# Altium PCB pmod_qspi_wson.PcbDoc
Units mil, origin at the board's own origin, x right, y up, seen from the top; angles counter-clockwise.
Board outline 1800 x 740 mil, 2 copper layers (Top Layer, Bottom Layer); 18 components, 19 nets, 82 pads, 24 vias.
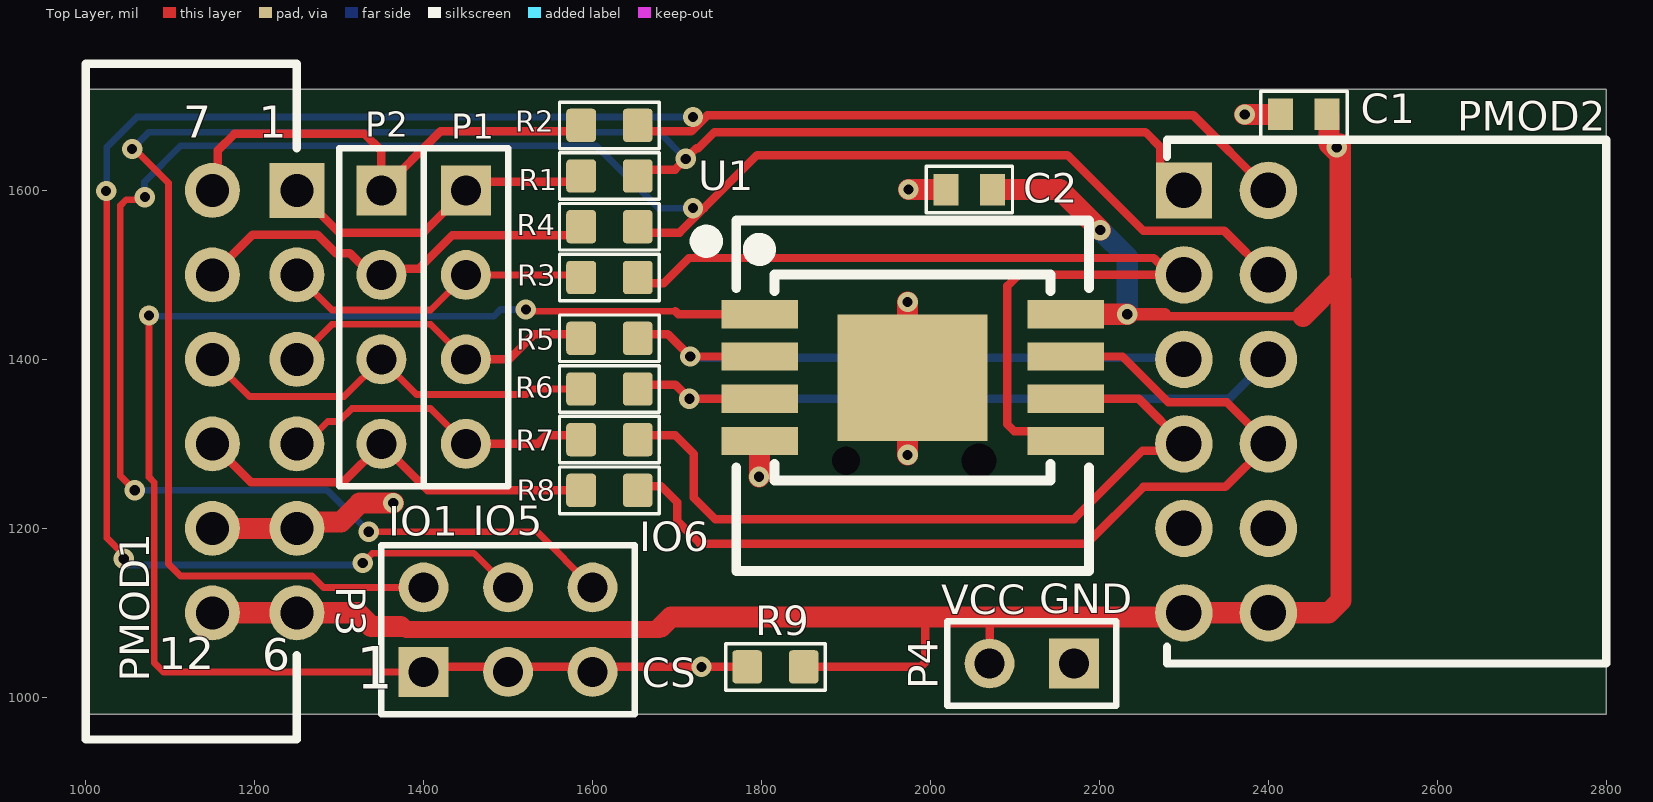
[diagram p0: Top Layer view]
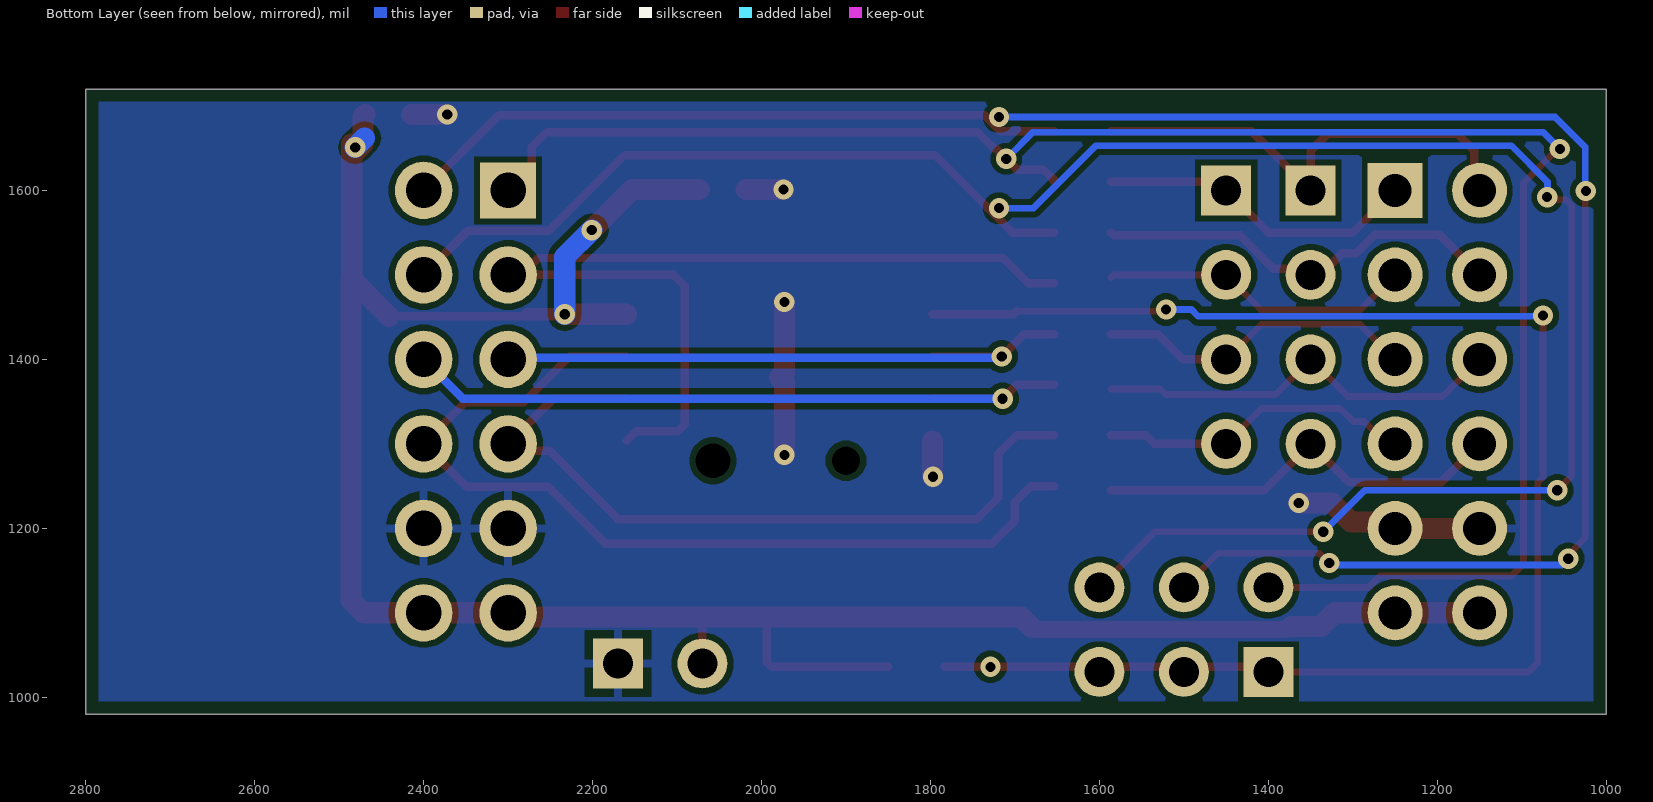
[diagram p1: Bottom Layer view, seen from below]

## Layer stack, top to bottom
Top Solder: solder mask 0.4, Solder Resist, Dk 3.5
Top Layer: signal copper 1.4
Dielectric 1: dielectric 12.6, FR-4, Dk 4.8
Bottom Layer: signal copper 1.4
Bottom Solder: solder mask 0.4, Solder Resist, Dk 3.5

## Board outline
1000,980 2800,980 2800,1720 1000,1720

## Design rules (kind name [scope] priority, off if disabled: settings)
BoardOutlineClearance [All] p1: gap=15 ignorepadtopadclearanceinfootprint=FALSE except(0: Arc-SplitContinuation Track-SplitContinuation SMDPad-SplitContinuation THPad-SplitContinuation Via-SplitContinuation Fill-SplitContinuation Poly-SplitContinuation Region-SplitContinuation Text-SplitContinuation)
Clearance [All] p1: gap=7 ignorepadtopadclearanceinfootprint=FALSE except(0: Arc-Hole Track-Hole SMDPad-Hole THPad-Hole Via-Hole Fill-Hole Poly-Hole Region-Hole Text-Hole)
PolygonConnect PolygonConnect_1 [isVia] p1: connectstyle=Direct reliefconductorwidth=10 reliefentries=4 polygonreliefangle="90 Angle" airgapwidth=10
PolygonConnect [All] p2: connectstyle=Relief reliefconductorwidth=10 reliefentries=4 polygonreliefangle="90 Angle" airgapwidth=10
RoutingVias [All] p1: holewidth=28 width=50 viastyle="Through Hole" minholewidth=12 minwidth=24 maxholewidth=28 maxwidth=50
SolderMaskExpansion [All] p1: expansion=4 istentingtop=FALSE
Width [All] p1: maxlimit=255 minlimit=6 preferedwidth=10 minimp=50.000000 maximp=50.000000 favimp=50.000000
30 further rules are at their usual default settings.

## Components (designator, comment, footprint, x,y, rotation, side; value= is the part's Value field where it differs from the comment)
C1 "100n" CAPC0603_M 2442,1690 r180 top
C2 "2u2" CAPC0603_M 2046,1601 r180 top
P1 "Header 4" HDR1X4 1450,1600 r270 top
P2 "Header 4" HDR1X4 1350,1600 r270 top
P3 "Header 3X2" HDR2X3 1400,1030 r0 top
P4 "Header 2" HDR1X2 2170,1040 r180 top
PMOD1 "PMOD-PINS" PMOD-68021-212HLF-MALE 1250,1600 r0 top
PMOD2 "PMOD-SOCKET" SAMTEC_SSW_106_02_X_D_RA_PMOD 2300,1600 r0 top
R1 "4R7" RESC1608X55N 1620,1617 r0 top
R2 "4R7" RESC1608X55N 1620,1677 r0 top
R3 "4R7" RESC1608X55N 1620,1497 r0 top
R4 "4R7" RESC1608X55N 1620,1557 r0 top
R5 "4R7" RESC1608X55N 1620,1425 r0 top
R6 "4R7" RESC1608X55N 1620,1365 r0 top
R7 "4R7" RESC1608X55N 1620,1305 r0 top
R8 "4R7" RESC1608X55N 1620,1245 r0 top
R9 "10k" RESC1608X55N 1816.54,1036 r0 top
U1 "WSON68 Socket or SPI on Board" SOK-SPI-WSON68_ORCHIP 1978.74,1378.43 r0 top

## Footprints (in the part's own frame and the unit in brackets; to place one, negate y for a bottom-side part, rotate by r counter-clockwise, add the part's x,y. Pads: shape width x height; smd on the part's side, far side on the other; paste and mask are expansions set on the pad)
CAPC0603_M [mm]
  rect 0.75x0.95 smd: 1(-0.7,0) 2(0.7,0)
  silkscreen extent -1.3,-0.7 1.3,0.7, body extent -0.85,-0.45 0.85,0.45, height 0.9
HDR1X2 [mm]
  rect 1.5x1.5 hole 0.9: 1(0,0)
  round 1.5 hole 0.9: 2(2.54,0)
  silkscreen extent -1.27,-1.27 3.81,1.27
HDR1X4 [mm] "Connector; Header; 4 Position"
  rect 1.5x1.5 hole 0.9: 1(0,0)
  round 1.5 hole 0.9: 2(2.54,0) 3(5.08,0) 4(7.62,0)
  silkscreen extent -1.27,-1.27 8.89,1.27
HDR2X3 [mm] "Connector; Header; 3x2 Position"
  rect 1.5x1.5 hole 0.9: 1(0,0)
  round 1.5 hole 0.9: 2(0,2.54) 3(2.54,0) 4(2.54,2.54) 5(5.08,0) 6(5.08,2.54)
  silkscreen extent -1.27,-1.27 6.35,3.81
PMOD-68021-212HLF-MALE [mil]
  rect 65x65 hole 39: 1(0,0)
  round 65 hole 39: 2(0,-100) 3(0,-200) 4(0,-300) 5(0,-400) 6(0,-500) 7(-100,0) 8(-100,-100) 9(-100,-200) 10(-100,-300) 11(-100,-400) 12(-100,-500)
  silkscreen extent -250,-650 0,150, body extent -490,-550 13,50, height 191
RESC1608X55N [mm] "Chip Resistor, Body 1.6x0.8mm, EIA 0603, IPC Medium Density"
  round 0.254 on Mech15: 0(0,0)
  rrect25% 0.9x1 smd: 1(-0.85,0) 2(0.85,0)
  Top Layer pour cut-out: -0.6,0.5 0.6,0.5 0.6,-0.5 -0.6,-0.5
  silkscreen extent -1.5,-0.7 1.5,0.7, body extent -0.87,-0.47 0.88,0.48, height 0.54
SAMTEC_SSW_106_02_X_D_RA_PMOD [mil]
  rect 66x66 hole 42: 1(0,0)
  round 68 hole 42: 2(0,-100) 3(0,-200) 4(0,-300) 5(0,-400) 6(0,-500) 7(100,0) 8(100,-100) 9(100,-200) 10(100,-300) 11(100,-400) 12(100,-500)
  silkscreen extent -20,-560 500,60, body extent -8,-560 495,60, height 195
SOK-SPI-WSON68_ORCHIP [mm] "DediProg SOK-SPI-WSON68 (Socket or Chip)"
  rect 2.3x0.85 smd: 1(-4.6,1.905) 2(-4.6,0.635) 3(-4.6,-0.635) 4(-4.6,-1.905) 5(4.6,-1.905) 6(4.6,-0.635) 7(4.6,0.635) 8(4.6,1.905)
  rect 4.5x3.8 smd: 9(0,0)
  round 0 hole 0.85 unplated: MH1(-2,-2.5)
  round 0 hole 1.05 unplated: MH1(2,-2.5)
  silkscreen extent -6.45,-5.82 5.3,4.72, body extent -5.11,-5.6 5.11,4.55, height 2.91

## Part data
C1: library part CCHIP-100n-0603, "100n, 0603", Case-EIA=0603, Case-Metric=1608, Manufacture 1=Kemet, Manufacture Part Number 1=C0603C104K5RACTU, Rated Voltage=50VDC, Supplier Part Number 1=399-5089-2-ND, Component Group=Capacitor, Component Type=Standard, Mounting Technology=SMT, Part Number=CCHIP-100n-0603, Pin Count=2, Supplier 1=Digi-Key
C2: library part CCHIP-2u2-0603, "2u2, 0603", Case-EIA=0603, Case-Metric=1608, Manufacture 1=Samsung, Manufacture Part Number 1=CL10B225KP8NNNC, Rated Voltage=10VDC, Supplier Part Number 1=1276-1134-1-ND, Component Group=Capacitor, Component Type=Standard, Mounting Technology=SMT, Part Number=CCHIP-2u2-0603, Pin Count=2, Supplier 1=Digi-Key
P1 P2: "Header, 4-Pin", LatestRevisionDate=17-Jul-2002, LatestRevisionNote="Re-released for DXP Platform.", Publisher="Altium Limited"
P3: library part CMP-011-000094-1, "Header, 3-Pin, Dual row", Component Type=Standard, Design Item ID="Header 3X2", LatestRevisionDate=17-Jul-2002, LatestRevisionNote="Re-released for DXP Platform.", Pin Count=6, Publisher="Altium Limited", Source="Miscellaneous Connectors.SchLib"
P4: library part CMP-004-000001-1, "Header, 2-Pin", Component Type=Standard, Design Item ID="Header 2", LatestRevisionDate=17-Jul-2002, LatestRevisionNote="Re-released for DXP Platform.", Pin Count=2, Publisher="Altium Limited", Source=CW313_20pinToTarget.SCHLIB
PMOD1: library part PMOD_2ROW_MALERATH, Component Group=Connector, Component Type=Standard, Part Number=PMOD_2ROW_MALERATH, Pin Count=12, PP Material Stack=0, PP Rotation=0, PP Rotation1=0, Supplier 1=Digi-Key
PMOD2: library part PMOD_2ROW_FEMALERATH, Supplier Part Number 1=SAM1215-06-ND, Component Group=Connector, Component Type=Standard, Part Number=PMOD_2ROW_FEMALERATH, Pin Count=12, PP Material Stack=0, PP Rotation=0, PP Rotation1=0, Supplier 1=Digi-Key
R1 R2 R3 R4 R5 R6 R7 R8: library part RCHIP-4R7-0603, "4R7 res, 0603, 1%, 1/10W", Case-EIA=0603, Case-Metric=1608, Manufacture 1=Yageo, Manufacture Part Number 1=RC0603FR-074R7L, Rated Power=0.1W, Rated Voltage=75VDC, Supplier Part Number 1=YAG3371CT-ND, Temperature Range="-55C to 155C", Tolerance=1%, Component Group=Resistor, Component Type=Standard, Mounting Technology=SMT, Part Number=RCHIP-4R7-0603, Pin Count=2, Supplier 1=Digi-Key
R9: library part RCHIP-10K-0603, "10k res, 0603, 1%, 1/10W", Case-EIA=0603, Case-Metric=1608, Manufacture 1=Yageo, Manufacture Part Number 1=RC0603FR-0710KL, Rated Power=0.1W, Rated Voltage=75VDC, Supplier Part Number 1=311-10.0KHRCT-ND, Temperature Range="-55C to 155C", Tolerance=1%, Component Group=Resistor, Component Type=Standard, Mounting Technology=SMT, Part Number=RCHIP-10K-0603, Pin Count=2, Supplier 1=Digi-Key
U1: library part SOK-SPI-WSON68_OR_QSPI, "WSON-6x8 Socket OR WSON Flash", Manufacture 1=Dedi-Prog/Micron, Manufacture Part Number 1="SOK-SPI-WSON68 / MT25QL256ABA1EW9-0SIT", Component Group=Connector, Component Type=Standard, Mounting Technology=SMT, Part Number=SOK-SPI-WSON68_OR_QSPI, Pin Count=8, PP Material Stack=0, PP Rotation=0, PP Rotation1=0, RoHS=Yes, Supplier 1=Digi-Key

## Via types
v1: diameter 24, hole 12, Top Layer to Bottom Layer, 24 vias

## Nets (pads, with @x,y where several pads share a name; then routed paths per layer and width w, separated by ;. In a path a pad name is that pad's centre, name@x,y a point inside that pad or via, vN(x,y) a via of type N, cw(c..) or ccw(c..) an arc to the next point about the centre after c; other vN are vias at no path point)
GND: C1.2 C2.2 P4.1 PMOD1.5 PMOD1.11 PMOD2.5 PMOD2.11 U1.4 U1.9 | length 541.8
  Top Layer w25: PMOD1.11 PMOD1.5 1257.65,1207.65 1302.11,1207.65 1324.45,1230 v1(1364,1230) ; v1(1797,1261) 1797.64,1261.64 U1.4 ; v1(1973,1287) 1973,1372.68 U1.9 1973,1384.17 v1(1973,1468) ; v1(1974,1601) C2.2 ; v1(2372,1690) C1.2
NetP1_1: P1.1 PMOD1.1 R1.1 | length 382.1
  Top Layer w10: PMOD1.1 1300,1550 1400,1550 P1.1 1460,1610 R1.1@1586.54,1610
NetP1_2: P1.2 PMOD1.2 R3.1 | length 372.2
  Top Layer w8: PMOD1.2 1291.53,1458.47 1408.47,1458.47 P1.2 1583.54,1500 R3.1
NetP1_3: P1.3 PMOD1.3 R5.1 | length 383.4
  Top Layer w8: PMOD1.3 1291.53,1441.53 1408.47,1441.53 P1.3
  Top Layer w10: P1.3 1501,1400 1531,1430 R5.1@1586.54,1430
NetP1_4: P1.4 PMOD1.4 R7.1 | length 378.4
  Top Layer w8: PMOD1.4 1265,1300 1265,1304.97 1286.48,1326.45 1299.45,1326.45 1315,1342 1408,1342 P1.4
  Top Layer w10: P1.4 1535,1300 1545,1310 R7.1@1586.54,1310
NetP2_1: P2.1 PMOD1.7 R2.1 | length 572.6
  Top Layer w10: PMOD1.7 1156.5,1606.5 1156.5,1647.5 1176,1667 1330,1667 1350,1647 P2.1 1420,1670 R2.1@1586.54,1670
NetP2_2: P2.2 PMOD1.8 R4.1 | length 496.6
  Top Layer w10: PMOD1.8 1197.5,1547.5 1274.22,1547.5 1296.09,1525.62 1312.65,1525.62 1338.27,1500 P2.2 1357.5,1507.5 1394.53,1507.5 1433.77,1546.74 1583.28,1546.74 R4.1@1586.54,1550
NetP2_3: P2.3 PMOD1.9 R6.1 | length 492.9
  Top Layer w8: PMOD1.9 1194,1356 1306,1356 P2.3 1391.53,1358.47 1521.47,1358.47 1528,1365 R6.1
NetP2_4: P2.4 PMOD1.10 R8.1 | length 497
  Top Layer w10: PMOD1.10 1195.5,1254.5 1304.5,1254.5 P2.4 1405,1245 R8.1
NetP3_1: P3.1 P3.3 P3.5 R9.1 U1.1 | length 1851.3
  Top Layer w8: v1(1075,1452) 1075,1260.53 1081,1254.53 1081,1041 1092,1030 P3.1 ; v1(1521,1459) 1523,1457 1698,1457
  Top Layer w10: P3.1 1406,1036 1500,1036 1600,1036 v1(1729,1036) R9.1 ; 1698,1457 1701.57,1453.43 U1.1
  Bottom Layer w8: v1(1075,1452) 1076,1451 1483,1451 1491,1459 v1(1521,1459)
PMOD2_IO1: P3.2 PMOD2.1 R1.2 | length 2215.5
  Top Layer w8: v1(1055,1649) 1058,1649 1098,1609 1098,1157.69 1112.19,1143.5 1268.02,1143.5 1281.52,1130 P3.2
  Top Layer w10: R1.2@1653.46,1610 1653.46,1611.97 1666.18,1624.69 1697.69,1624.69 v1(1710.34,1637.34) 1723,1650 1725.18,1650 1744.18,1669 2254.43,1669 2272,1651.43 2272,1628 PMOD2.1
  Bottom Layer w8: v1(1055,1649) 1075,1669 1678.69,1669 v1(1710.34,1637.34)
PMOD2_IO2: PMOD2.2 R3.2 U1.5 | length 1106.9
  Top Layer w10: R3.2@1653.46,1490 1684,1490 1714,1520 2264.31,1520 PMOD2.2@2284.31,1500 ; U1.5 2148.11,1315.16 2098.84,1315.16 2091,1323 2091,1487 2104,1500 PMOD2.2@2284.31,1500 ; PMOD2.2 PMOD2.2@2284.31,1500
PMOD2_IO3: PMOD2.3 R5.2 U1.2 | length 741
  Top Layer w10: R5.2@1653.46,1430 1689,1430 v1(1715.57,1403.43) U1.2
  Bottom Layer w10: v1(1715.57,1403.43) 1717.29,1401.71 2298.29,1401.71 PMOD2.3
PMOD2_IO4: PMOD2.4 R7.2 U1.6 | length 917.2
  Top Layer w10: R7.2@1653.46,1310 1698,1310 1720,1288 1720,1236 1745,1211 2170,1211 2251,1292 2292,1292 PMOD2.4 2246.57,1353.43 U1.6
PMOD2_IO5: P3.4 PMOD2.7 R2.2 | length 2487.7
  Top Layer w8: v1(1024.18,1599.3) 1025,1598.48 1025,1188.33 1045,1168.33 v1(1045,1164) ; v1(1328,1159) 1339.53,1170.53 1459.47,1170.53 P3.4
  Top Layer w10: R2.2@1653.46,1670 1716.9,1670 v1@1726.4,1679.5 ; v1(1718.9,1687) v1@1726.4,1679.5 ; PMOD2.7 2311,1689 1735.9,1689 v1@1726.4,1679.5
  Bottom Layer w8: v1(1024.18,1599.3) 1025,1600.13 1025,1651.53 1060.47,1687 v1(1718.9,1687) ; v1(1045,1164) 1052.5,1156.5 1325.5,1156.5 v1(1328,1159)
PMOD2_IO6: P3.6 PMOD2.8 R4.2 | length 2539.3
  Top Layer w8: v1(1058,1245) 1041,1262 1041,1582 1047.94,1588.94 1066.94,1588.94 v1(1070,1592) ; v1(1335,1196) 1534,1196 P3.6
  Top Layer w10: R4.2@1653.46,1550 1703,1550 1732,1579 ; v1(1719,1579) 1732,1579 ; PMOD2.8 2347.75,1552.25 2339.46,1552.25 2339.21,1552 2252,1552 2162.14,1641.86 1794.86,1641.86 1732,1579
  Bottom Layer w8: v1(1058,1245) 1286,1245 v1(1335,1196) ; v1(1070,1592) 1069.74,1592.26 1069.74,1610.2 1112.55,1653 1604,1653 1678,1579 v1(1719,1579)
PMOD2_IO7: PMOD2.9 R6.2 U1.3 | length 855.8
  Top Layer w10: R6.2@1653.46,1370 1698,1370 v1(1714.57,1353.43) U1.3
  Bottom Layer w10: v1(1714.57,1353.43) 2353.43,1353.43 PMOD2.9
PMOD2_IO8: PMOD2.10 R8.2 U1.7 | length 1119.5
  Top Layer w10: R8.2@1653.46,1250 1681,1250 1700,1231 1700,1209 1727,1182 2185,1182 2252,1249 2349,1249 PMOD2.10 2351,1349 2281.7,1349 2227.28,1403.43 U1.7
VCC: C1.1 C2.1 P4.2 PMOD1.6 PMOD1.12 PMOD2.6 PMOD2.12 R9.2 U1.8 | length 2831
  Top Layer w10: R9.2 1988.14,1036 1994,1041.86 1994,1095 ; 2063,1095 2070,1088 P4.2 ; 2277.28,1453.43 2279.7,1451 2441,1451
  Top Layer w15: v1(2233,1453.43) 2277.28,1453.43
  Top Layer w20: 1372.42,1084 1375.96,1084 1379.48,1080.47 1678.47,1080.47 1681,1083
  Top Layer w25: PMOD1.12 PMOD1.6 1322,1100 1338,1084 1372.42,1084 ; 1681,1083 1693,1095 1994,1095 2063,1095 2295,1095 PMOD2.6 PMOD2.12 2471.36,1100 2486,1114.64 2486,1494 2485,1495 ; C2.1 2153,1601 v1(2201,1553) ; U1.8 v1(2233,1453.43) ; 2441,1451 2485,1495 ; C1.1 2471.82,1687.74 2471.82,1655.18 v1@2485,1642 ; v1@2485,1655 v1@2485,1642 ; 2485,1495 v1@2485,1642
  Bottom Layer w25: v1(2201,1553) 2233,1521 v1(2233,1453.43) ; 2470,1662 v1(2481,1651)
pads on no net: R1.0 R2.0 R3.0 R4.0 R5.0 R6.0 R7.0 R8.0 R9.0 U1.MH1

## Polygon pours and split planes (outlines as drawn)
GND on Bottom Layer "GND_L02_P000" (solid, remove dead copper, pour order 0): 975,1770 983,1778 2811,1778 2811,968 2761,918 975,918

## Silkscreen, mask and mechanical layers (free items; w line width, h text height)
Top Overlay:
  text "IO5" at 1458,1192 h35
  text "IO1" at 1358,1191 h35
  text "IO6" at 1655,1173 h35
  text "GND" at 2128.54,1099.53 h35
  text "VCC" at 2013,1098 h35
  text "CS" at 1658,1012 h35
Mechanical 1:
  lines w6: 1000,980 1000,1720 1020,1720 2800,1720 2800,980 1000,980

## Text inside footprints (layer, text, board x,y; h text height)
P3: Top Overlay "1" at 1320,1010 h50
PMOD1: Top Overlay "1" at 1204.86,1650.02 h65; Top Overlay "7" at 1115.33,1650.1 h65; Top Overlay "12" at 1085.83,1020.61 h65; Top Overlay "6" at 1209.07,1019.81 h65